# Altium PCB PCB1.PcbDoc
Units mm, origin at the board's own origin, x right, y up, seen from the top; angles counter-clockwise.
Board outline 50 x 80 mm, 2 copper layers (Top Layer, Bottom Layer); 31 components, 41 nets, 142 pads, 4 vias.
Unrouted connection lines stored in the file: 59.
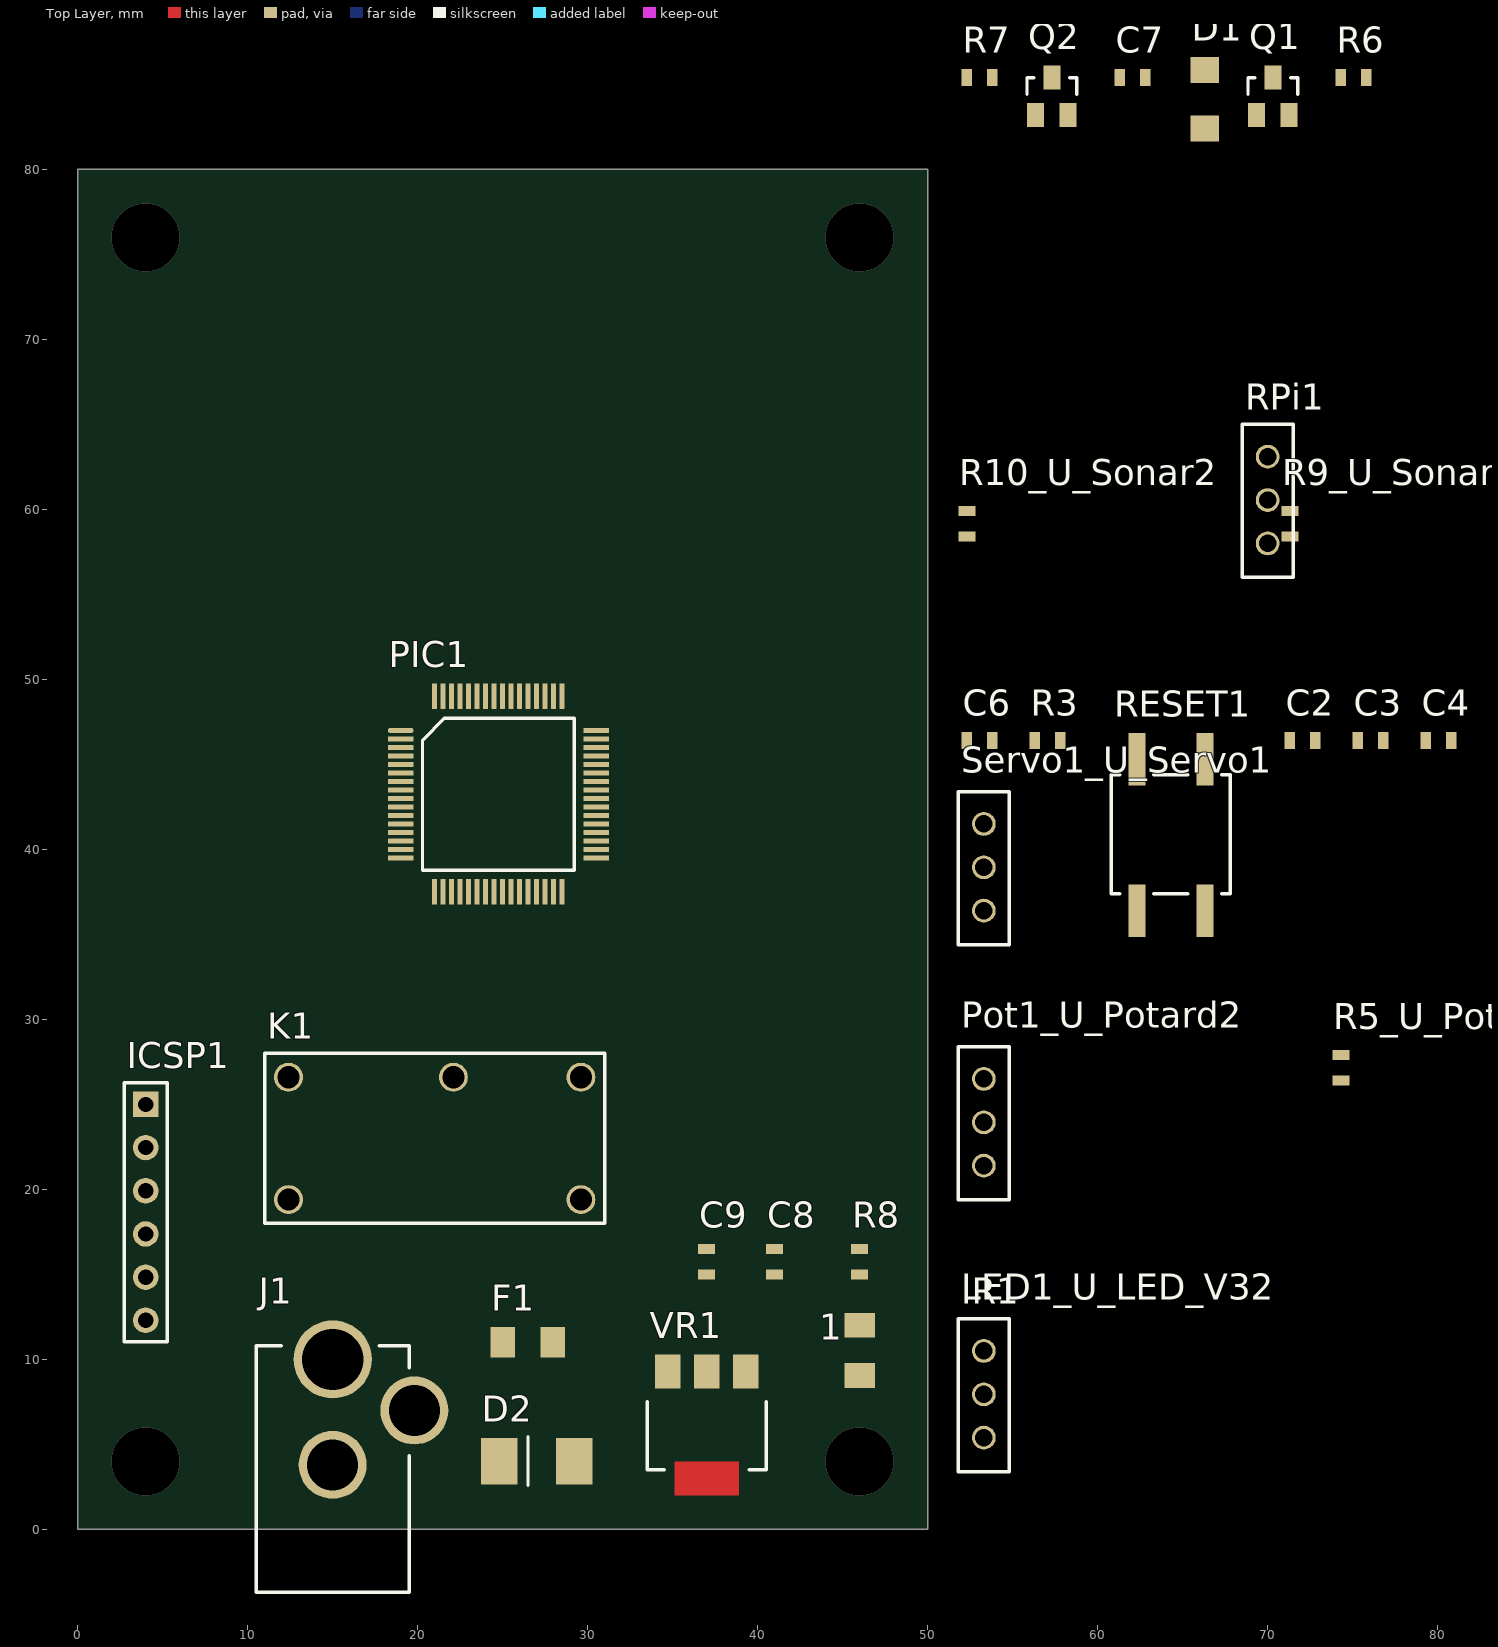
[diagram p0: Top Layer view]
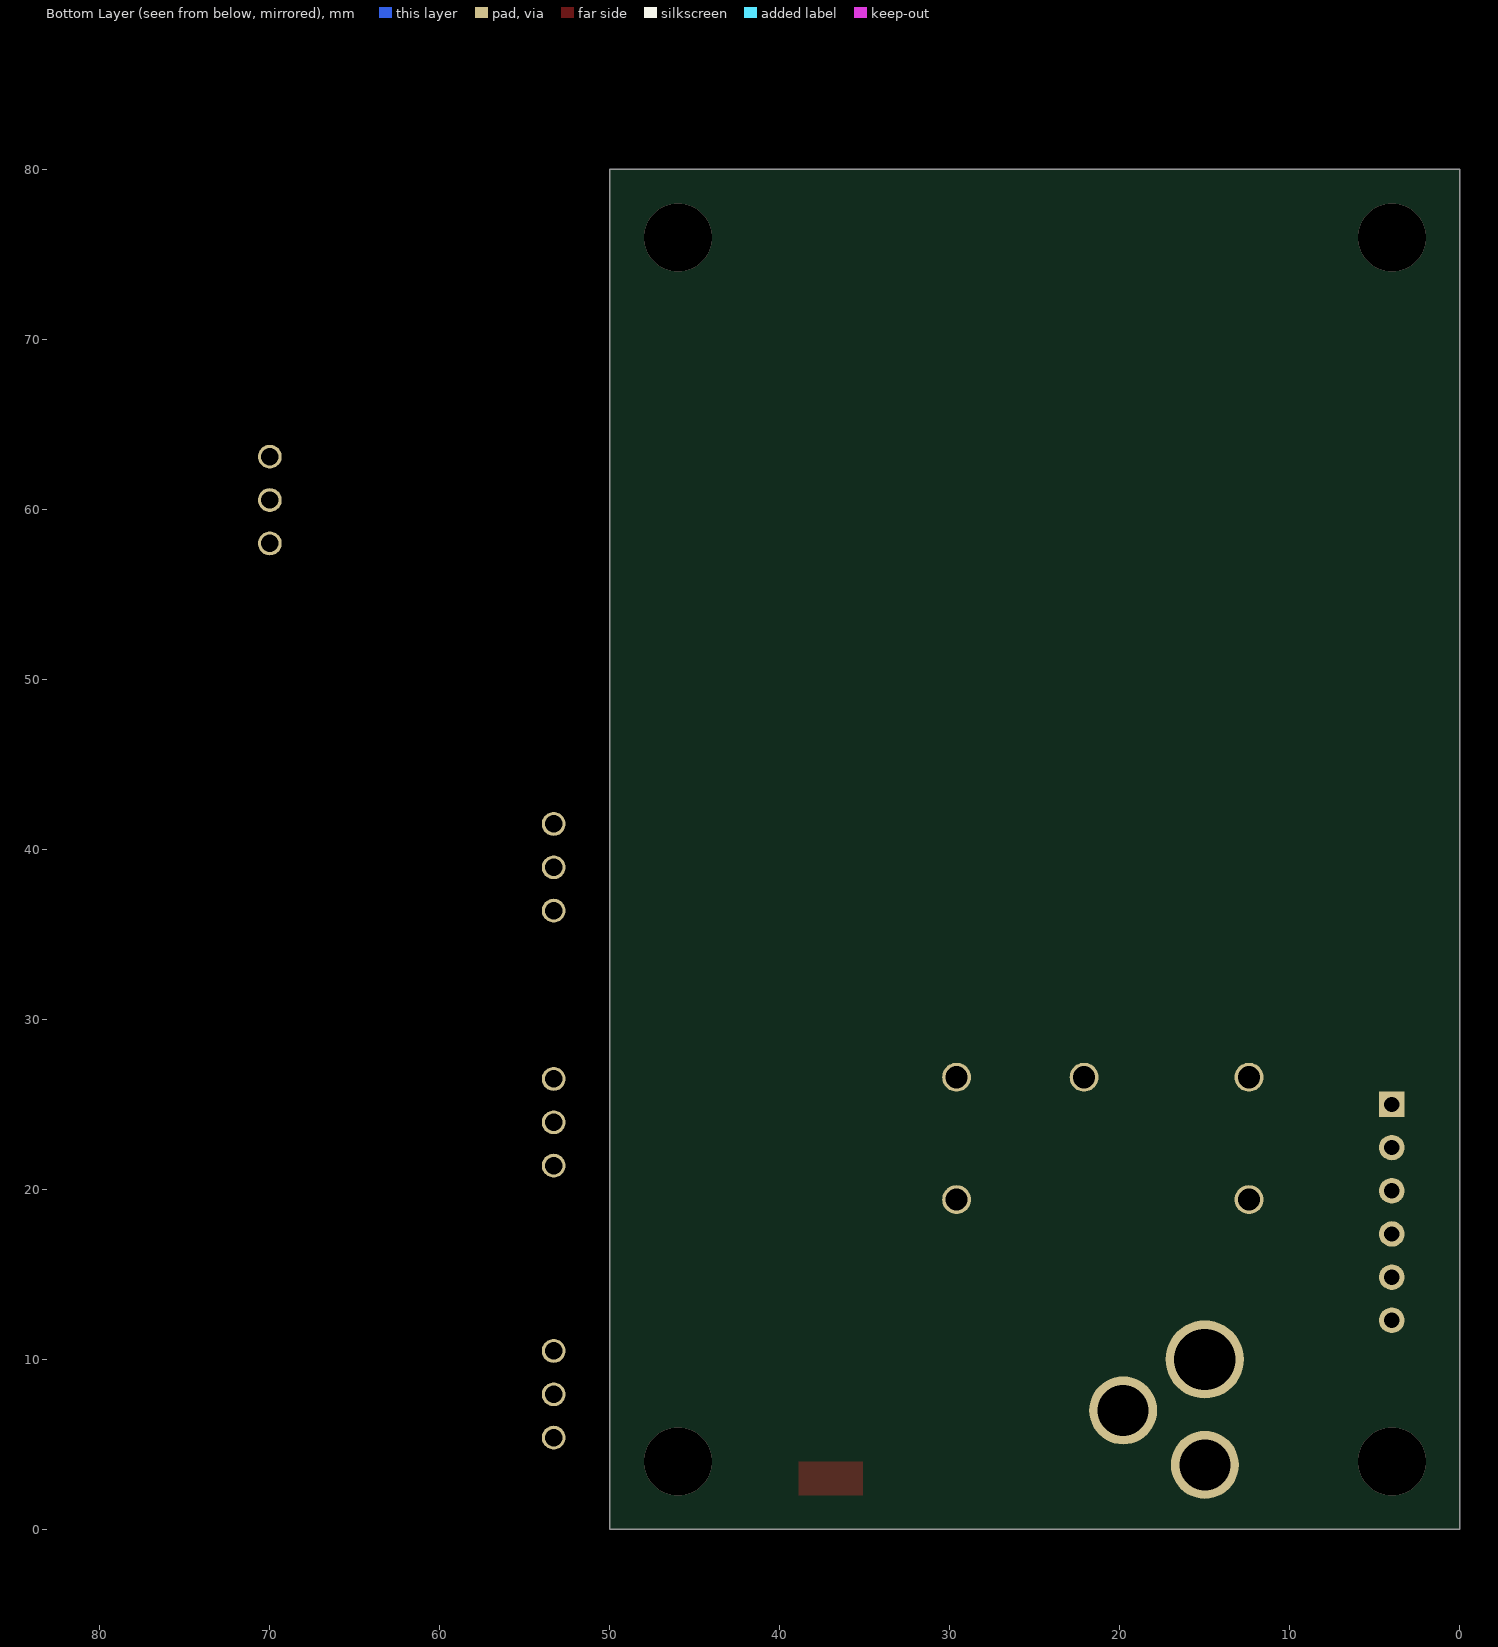
[diagram p1: Bottom Layer view, seen from below]

## Layer stack, top to bottom
Top Solder: solder mask 0.0102, Solder Resist, Dk 3.5
Top Layer: signal copper 0.0356
Dielectric 1: dielectric 0.32, FR-4, Dk 4.8
Bottom Layer: signal copper 0.0356
Bottom Solder: solder mask 0.0102, Solder Resist, Dk 3.5

## Board outline
0,0 50,0 50,80 0,80

## Design rules (kind name [scope] priority, off if disabled: settings)
Clearance [All] p1: gap=0.254
PolygonConnect [All] p1: connectstyle=Relief reliefconductorwidth=0.254 reliefentries=4 polygonreliefangle="90 Angle" airgapwidth=0.254
RoutingVias [All] p1: holewidth=0.711 width=1.27 viastyle="Through Hole" minholewidth=0.711 minwidth=1.27 maxholewidth=0.711 maxwidth=1.27
SolderMaskExpansion [All] p1: expansion=0.102
UnpouredPolygon [All] p1: allowunpoured=FALSE
Width [All] p1: maxlimit=0.254 minlimit=0.254 preferedwidth=0.254
29 further rules are at their usual default settings.

## Classes and differential pairs
channel class Sonar: U_Sonar1 U_Sonar2
channel class Servo: U_Servo1 U_Servo2 U_Servo3
channel class Potard: U_Potard1 U_Potard2
channel class LED_V3: U_LED_V31 U_LED_V32
component class U_Sonar2: R9_U_Sonar2 R10_U_Sonar2
component class U_Servo1: Servo1_U_Servo1
component class U_Potard2: Pot1_U_Potard2 R5_U_Potard2
component class U_LED_V32: LED1_U_LED_V32
component class U_RPI: RPi1
component class U_Regul: 1 C8 C9 D2 F1 J1 R8 VR1
component class U_Power_v2: C7 D1 K1 Q1 Q2 R6 R7
component class U_PIC: C2 C3 C4 C6 ICSP1 PIC1 R3 RESET1
component class U_IrSensor: IR1

## Components (designator, comment, footprint, x,y, rotation, side; value= is the part's Value field where it differs from the comment)
1 "" "3216 / 1206" 46,12 r270 top
C2 "Cap" "1608 / 0603" 71.3,46.4 r0 top
C3 "Cap" "1608 / 0603" 75.3,46.4 r0 top
C4 "Cap" "1608 / 0603" 79.3,46.4 r0 top
C6 "Cap" "1608 / 0603" 52.3,46.4 r0 top
C7 "Cap" "1608 / 0603" 61.3,85.4 r0 top
C8 "Cap" "1608 / 0603" 41,15 r90 top
C9 "Cap" "1608 / 0603" 37,15 r90 top
D1 "Diode GF1A" SMA/DO-214AC_21 66.3,82.4 r90 top
D2 "D Zener 1N5338BRLG" "DIODE ZENER" 27,4 r180 top
F1 "MCPFP 5A 125V" "3216 / 1206" 25,11 r0 top
ICSP1 "" HDR1X6 4,25 r270 top
IR1 "IR_Connector" "IR SENSOR CONNECTOR" 53.3,5.4 r90 top
J1 "PWR2.5" RAPC712BK 15,10 r0 top
K1 "Relay-SPDT G5V-1" PE014005 21,23 r0 top
LED1_U_LED_V32 "Leds_Connector" "LEDS CONNECTOR" 53.3,5.4 r90 top (schematic designator LED1)
PIC1 "PIC32MX340F512H" PIC32MX340F512H 19,47 r0 top
Pot1_U_Potard2 "Potard_Connector" "POTARD CONNECTOR" 53.3,21.4 r90 top (schematic designator Pot1)
Q1 "MOSFET-P ZVP2106A" SOT23 70.3,85.4 r0 top
Q2 "MOSFET-N 2N7002K" SOT23 57.3,85.4 r0 top
R3 "0r" "1608 / 0603" 56.3,46.4 r0 top
R5_U_Potard2 "Res1" "1608 / 0603" 74.3,26.4 r90 top (schematic designator R5)
R6 "Res1" "1608 / 0603" 74.3,85.4 r0 top
R7 "Res1" "1608 / 0603" 52.3,85.4 r0 top
R8 "Res1" "1608 / 0603" 46,15 r90 top
R9_U_Sonar2 "Res1" "1608 / 0603" 71.3,58.4 r90 top (schematic designator R9)
R10_U_Sonar2 "Res1" "1608 / 0603" 52.3,58.4 r90 top (schematic designator R10)
RESET1 "SW-PB" GULLWING 62.3,36.4 r90 top
RPi1 "RPi_Connector" "RPI CONNECTOR" 70,58 r90 top
Servo1_U_Servo1 "Servo_Connector" "SERVO CONNECTOR" 53.3,36.4 r90 top (schematic designator Servo1)
VR1 "Regul LD1117S33TR" SOT-223 37,3 r180 top

## Footprints (in the part's own frame and the unit in brackets; to place one, negate y for a bottom-side part, rotate by r counter-clockwise, add the part's x,y. Pads: shape width x height; smd on the part's side, far side on the other; paste and mask are expansions set on the pad)
"1608 / 0603" [mm] "0603"
  rect 0.6x1 smd mask+0.2: 1(0,0) 2(1.5,0)
"3216 / 1206" [mm]
  rect 1.45x1.8 smd mask+0.2: 1(0,0) 2(2.95,0)
"DIODE ZENER" [mm]
  rect 2.159x2.743 smd mask+0.2: 1(-2.21,0) 2(2.21,0)
  silkscreen extent 0.51,-1.45 0.51,1.4
GULLWING [mm]
  rect 3.1x1 smd mask+0.2: 1(0,0) 1(0,-4) 2(8.9,-4) 2(8.9,0)
  silkscreen extent 1,-5.5 8,1.5
HDR1X6 [mm] "Connector; Header; 6 Position"
  rect 1.5x1.5 hole 0.9: 1(0,0)
  round 1.5 hole 0.9: 2(2.54,0) 3(5.08,0) 4(7.62,0) 5(10.16,0) 6(12.7,0)
  silkscreen extent -1.27,-1.27 13.97,1.27
"IR SENSOR CONNECTOR" [mm]
  round 1.4 hole 1.02 mask+0.2: 1(0,0) 2(2.55,0) 3(5.1,0)
  silkscreen extent -2,-1.5 7,1.5
"LEDS CONNECTOR" [mm]
  round 1.4 hole 1.02 mask+0.2: 1(0,0) 2(2.55,0) 3(5.1,0)
  silkscreen extent -2,-1.5 7,1.5
PE014005 [mm] "RELAIS PE014005"
  round 1.7 hole 1.3 mask+0.2: 11(1.1,3.6) 12(8.6,-3.6) 14(8.6,3.6) A1(-8.6,3.6) A2(-8.6,-3.6)
  silkscreen extent -10,-5 10,5
PIC32MX340F512H [mm]
  oval 1.5x0.3 smd mask+0.2: 1(0,0)
  rect 1.5x0.3 smd mask+0.2: 2(0,-0.5) 3(0,-1) 4(0,-1.5) 5(0,-2) 6(0,-2.5) 7(0,-3) 8(0,-3.5) 9(0,-4) 10(0,-4.5) 11(0,-5) 12(0,-5.5) 13(0,-6) 14(0,-6.5) 15(0,-7) 16(0,-7.5) 33(11.5,-7.5) 34(11.5,-7) 35(11.5,-6.5) 36(11.5,-6) 37(11.5,-5.5) 38(11.5,-5) 39(11.5,-4.5) 40(11.5,-4) 41(11.5,-3.5) 42(11.5,-3) 43(11.5,-2.5) 44(11.5,-2) 45(11.5,-1.5) 46(11.5,-1) 47(11.5,-0.5) 48(11.5,0)
  rect 0.3x1.5 smd mask+0.2: 17(2,-9.5) 18(2.5,-9.5) 19(3,-9.5) 20(3.5,-9.5) 21(4,-9.5) 22(4.5,-9.5) 23(5,-9.5) 24(5.5,-9.5) 25(6,-9.5) 26(6.5,-9.5) 27(7,-9.5) 28(7.5,-9.5) 29(8,-9.5) 30(8.5,-9.5) 31(9,-9.5) 32(9.5,-9.5) 49(9.5,2) 50(9,2) 51(8.5,2) 52(8,2) 53(7.5,2) 54(7,2) 55(6.5,2) 56(6,2) 57(5.5,2) 58(5,2) 59(4.5,2) 60(4,2) 61(3.5,2) 62(3,2) 63(2.5,2) 64(2,2)
  silkscreen extent 1.28,-8.21 10.21,0.72
"POTARD CONNECTOR" [mm]
  round 1.4 hole 1.02 mask+0.2: 1(0,0) 2(2.55,0) 3(5.1,0)
  silkscreen extent -2,-1.5 7,1.5
RAPC712BK [mm] "PRISE JACK RAPC712BK"
  round 4.6 hole 3.6 mask+0.2: 1(0,0)
  round 4 hole 3 mask+0.2: 2(0,-6.2) 3(4.8,-3)
  silkscreen extent -4.5,-13.7 4.5,0.8
"RPI CONNECTOR" [mm]
  round 1.4 hole 1.02 mask+0.2: 1(0,0) 2(2.55,0) 3(5.1,0)
  silkscreen extent -2,-1.5 7,1.5
"SERVO CONNECTOR" [mm]
  round 1.4 hole 1.02 mask+0.2: 1(0,0) 2(2.55,0) 3(5.1,0)
  silkscreen extent -2,-1.5 7,1.5
SMA/DO-214AC_21 [mm]
  rect 1.52x1.68 smd mask+0.2: 1(0,0) 2(3.45,0)
SOT23 [mm] "MOSFET N 2N7002K"
  rect 1x1.4 smd mask+0.2: 1(-0.95,-2.2) 2(0.95,-2.2) 3(0,0)
  silkscreen extent -1.46,-0.97 1.46,0
SOT-223 [mm] "LD1117S33TR"
  rect 1.5x2 smd mask+0.2: 1(-2.3,-6.3) 2(0,-6.3) 3(2.3,-6.3)
  Top Layer region: -1.9,-1 1.9,-1 1.9,1 -1.9,1
  silkscreen extent -3.5,-4.5 3.5,-0.5

## Part data
1: library part LED0, "Typical INFRARED GaAs LED"
C2 C3 C4 C6 C7 C8 C9: "Capacitor"
D1: library part Diode, "Default Diode"
D2: library part "D Zener", "Zener Diode"
F1: library part "Fuse 1", "Fuse"
ICSP1: library part "Header 6", "Header, 6-Pin"
J1: "Low Voltage Power Supply Connector"
K1: library part Relay-SPDT, "Single-Pole Dual-Throw Relay"
Q1: library part MOSFET-P, "P-Channel MOSFET"
Q2: library part MOSFET-N, "N-Channel MOSFET"
R3: library part Res1, "Resistor"
R5_U_Potard2 R6 R7 R8 R9_U_Sonar2 R10_U_Sonar2: "Resistor"
RESET1: "Switch"
VR1: library part "Volt Reg", "Voltage Regulator"

## Via types
v1: diameter 4, hole 4, Top Layer to Bottom Layer, 4 vias

## Nets (pads, with @x,y where several pads share a name; then routed paths per layer and width w, separated by ;. In a path a pad name is that pad's centre, name@x,y a point inside that pad or via, vN(x,y) a via of type N, cw(c..) or ccw(c..) an arc to the next point about the centre after c; other vN are vias at no path point)
3V3MAIN: C6.2 C8.2 C9.2 ICSP1.2 PIC1.19 R8.2 VR1.3
5VIN: F1.1 J1.1
5VMAIN: D1.2 D2.2 F1.2 LED1_U_LED_V32.2 Q1.3 R6.2 VR1.1
GND: 1.2 C2.1 C6.1 C7.1 C8.1 C9.1 D2.1 ICSP1.3 IR1.1 J1.2 LED1_U_LED_V32.1 PIC1.20 Pot1_U_Potard2.1 Q2.2 R3.1 R7.1 R9_U_Sonar2.1 R10_U_Sonar2.1 RESET1.1 RPi1.3 Servo1_U_Servo1.1 VR1.2
Net1_1: 1.1 R8.1
NetC1_1: R3.2
NetC1_2: RESET1.2
NetC2_2: C2.2 PIC1.56
NetC3_1: C3.1 PIC1.41
NetC3_2: C3.2 PIC1.10
NetC4_1: C4.1 PIC1.25
NetC4_2: C4.2 PIC1.26
NetC5_1: PIC1.9
NetC5_2: PIC1.38
NetD1_1: D1.1 Q2.3
NetICSP1_1: ICSP1.1 PIC1.7
NetICSP1_4: ICSP1.4 PIC1.18
NetICSP1_5: ICSP1.5 PIC1.17
NetIR1_3: IR1.3 PIC1.14
NetJ1_3: J1.3
NetLED1_U_LED_V31_3: PIC1.52
NetLED1_U_LED_V32_3: LED1_U_LED_V32.3 PIC1.51
NetPIC1_12: PIC1.12
NetPIC1_13: PIC1.13 Pot1_U_Potard2.3
NetPIC1_33: PIC1.33 RPi1.2
NetPIC1_34: PIC1.34 RPi1.1
NetPIC1_42: PIC1.42 R9_U_Sonar2.2
NetPIC1_43: PIC1.43
NetPIC1_46: PIC1.46
NetPIC1_49: PIC1.49
NetPIC1_50: PIC1.50 Servo1_U_Servo1.3
NetPIC1_54: PIC1.54 R10_U_Sonar2.2
NetPIC1_55: PIC1.55
NetPIC1_60: PIC1.60 Q2.1 R7.2
NetPIC1_61: PIC1.61 Q1.2
NetPot1_U_Potard1_2: 
NetPot1_U_Potard2_2: Pot1_U_Potard2.2 R5_U_Potard2.1
NetR4_U_Potard1_1: 
NetR4_U_Potard2_1: R5_U_Potard2.2
"SENSOR VCC": IR1.2 Q1.1
"SERVO VCC": C7.2 Servo1_U_Servo1.2
pads on no net: ICSP1.6 K1.11 K1.12 K1.14 K1.A1 K1.A2 PIC1.1 PIC1.2 PIC1.3 PIC1.4 PIC1.5 PIC1.6 PIC1.8 PIC1.11 PIC1.15 PIC1.16 PIC1.21 PIC1.22 PIC1.23 PIC1.24 PIC1.27 PIC1.28 PIC1.29 PIC1.30 PIC1.31 PIC1.32 PIC1.35 PIC1.36 PIC1.37 PIC1.39 PIC1.40 PIC1.44 PIC1.45 PIC1.47 PIC1.48 PIC1.53 PIC1.57 PIC1.58 PIC1.59 PIC1.62 PIC1.63 PIC1.64 R6.1
copper on no net:
  other v1: 4,4 46,4 4,76 46,76

## Silkscreen, mask and mechanical layers (free items; w line width, h text height)
Board Outline:
  the board outline again, w0.2